# EAGLE board sbus-ppm_pad (EAGLE 5.11)
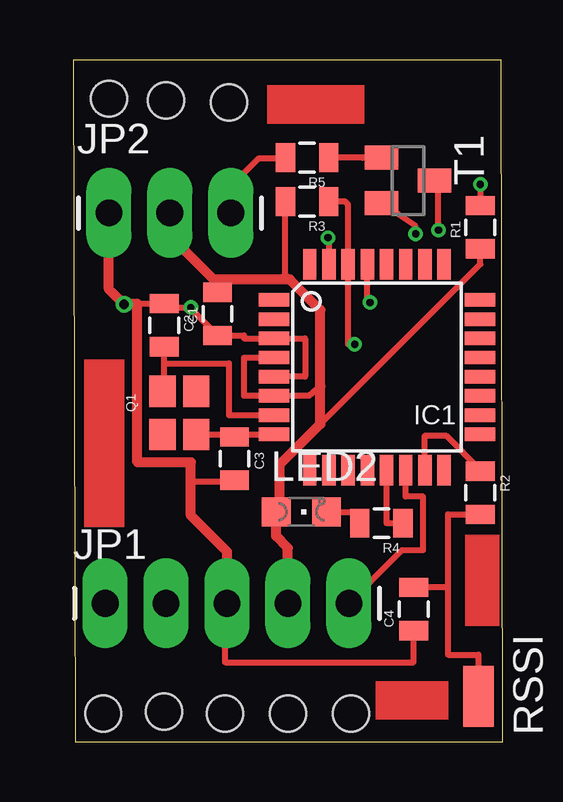
[diagram p0: board, top side]
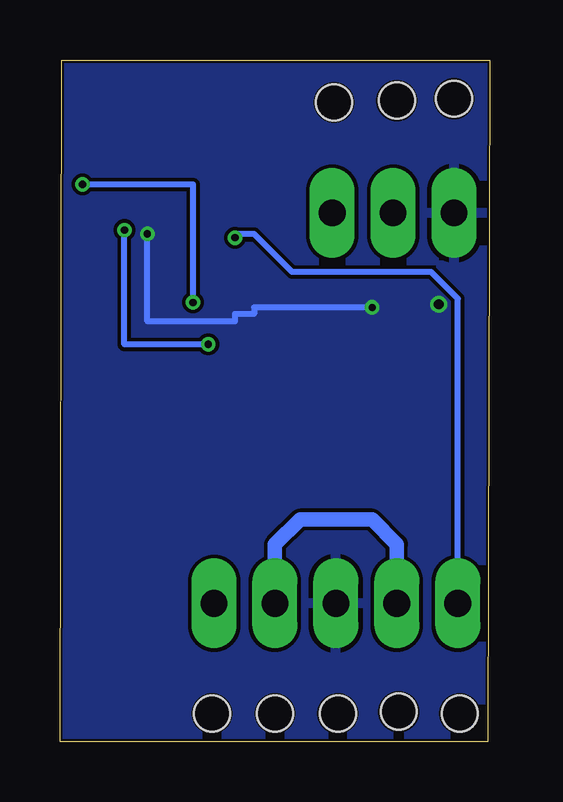
[diagram p1: board, bottom side, seen from below]

Size 17.9 x 28.42 mm. Coordinates in mm from the lower left corner, seen from the top.
Outline: 0.08,0 17.9,0 17.83,28.42 0,28.42 0.08,0
Copper layers (1*16): Top 0.035mm / dielectric 1.5mm / Bottom 0.035mm
Design rules "PCB-POOL Standard *": minimum track width 0.15mm, minimum drill 0.3mm, track to track 0.15mm, track to pad 0.15mm, pad to pad 0.15mm, via to via 0.15mm, smd to smd 0.15mm, copper to edge 0.1mm, drill to drill 0.2mm, minimum pad ring 0.2mm, minimum via ring 0.15mm, stop-mask expansion 0.075mm, vias tented up to drill 30mil, thermal gap 0.2mm
Holes 1.5 mm at 1.25,1.17 3.79,1.25 6.33,1.17 8.95,1.17 11.57,1.17 1.49,26.81 3.87,26.73 6.49,26.65

## Footprints (pad centres in the part's own frame; a part is rotated, then mirrored left to right if it is on the bottom)
0805 = smd 0.8 x 1.2: 1 -0.9,0; 2 0.9,0
TQFP32-08 = smd 1.27 x 0.559: 1 -4.293,2.8; 2 -4.293,2; 3 -4.293,1.2; 4 -4.293,0.4; 5 -4.293,-0.4; 6 -4.293,-1.2; 7 -4.293,-2; 8 -4.293,-2.8; 17 4.293,-2.8; 18 4.293,-2; 19 4.293,-1.2; 20 4.293,-0.4; 21 4.293,0.4; 22 4.293,1.2; 23 4.293,2; 24 4.293,2.8 | smd 0.559 x 1.27: 9 -2.8,-4.293; 10 -2,-4.293; 11 -1.2,-4.293; 12 -0.4,-4.293; 13 0.4,-4.293; 14 1.2,-4.293; 15 2,-4.293; 16 2.8,-4.293; 25 2.8,4.293; 26 2,4.293; 27 1.2,4.293; 28 0.4,4.293; 29 -0.4,4.293; 30 -1.2,4.293; 31 -2,4.293; 32 -2.8,4.293
1X05_LONGPADS = drill 1.118 pad 1.88 long: 1 0,0; 2 2.54,0; 3 5.08,0; 4 7.62,0; 5 10.16,0
1X03_LONGPADS = drill 1.118 pad 1.88 long: 1 0,0; 2 2.54,0; 3 5.08,0
CHIPLED_0805 = smd 1.2 x 1.2: A 0,-1.05; C 0,1.05
X22 = smd 1.3 x 1.1: 1 0.9,0.7; 2 -0.9,0.7; 3 -0.9,-0.7; 4 0.9,-0.7
SMD1,27-2,54 = smd 1.27 x 2.54: 1 0,0
SOT23 = smd 1 x 1.4: 1 -0.95,-1.1; 2 0.95,-1.1; 3 0,1.1

## Placement (x,y rotation side)
C1  100n  [0805]  6.01,17.84 270 top
C2  22n  [0805]  3.79,17.36 270 top
C3  22n  [0805]  6.72,11.8 90 top
C4  22µF  [0805]  14.19,5.53 90 top
IC1  atmega88  [TQFP32-08]  12.65,15.61 0 top
JP1  [1X05_LONGPADS]  1.33,5.77 0 top
JP2  [1X03_LONGPADS]  1.49,22.04 0 top
LED2  [CHIPLED_0805]  9.5,9.58 270 top
Q1  20 Mhz  [X22]  4.42,13.71 270 top
R1  1k  [0805]  16.96,21.44 90 top
R2  68k  [0805]  16.96,10.38 270 top
R3  1k  [0805]  9.74,22.52 180 top
R4  100R  [0805]  12.84,9.11 180 top
R5  10k  [0805]  9.74,24.35 180 top
RSSI  [SMD1,27-2,54]  16.88,1.88 0 top
T1  BC817  [SOT23]  13.95,23.39 270 top

## Library data of the parts
C1-C4 JP1 JP2 R1-R5 = SparkFun
IC1 = avr-4
LED2 = led
Q1 = seb
RSSI = wirepad
T1 = transistor

## Nets
+5V: C1.1 IC1.4 IC1.6 JP1.2 JP1.4 JP2.2 LED2.A R1.1 R3.2
AGND: IC1.21
GND: C1.2 C2.1 C3.1 C4.1 IC1.3 IC1.5 JP1.3 JP2.1 T1.2
N$3: IC1.15 R2.1
N$4: IC1.14 JP1.5
N$5: JP2.3 R5.2
N$7: C4.2 R2.2 RSSI.1
N$8: IC1.29 R1.2
N$9: C3.2 IC1.8 Q1.1
N$10: C2.2 IC1.7 Q1.3
N$11: R5.1 T1.1
N$12: IC1.31 JP1.1
N$14: LED2.C R4.2
N$15: IC1.13 R4.1
N$16: IC1.30 R3.1 T1.3

## Tracks (layer width: path | path; a pad name or v marks a point on that pad's centre or on a via)
+5V
  Top 0.254: 10.29,13.24 16.96,19.91 R1.1 | 10.29,14.82 9.82,14.41 IC1.6 7.12,14.41 7.12,16.02 IC1.4 | LED2.A 8.93,9.58 8.61,9.58 | C1.1 6.54,19.27 5.85,19.27 | R3.2 8.84,19.48 8.63,19.27
  Top 0.406: 8.61,9.58 8.61,11.01 8.61,11.56 10.29,13.24 10.29,14.82 10.29,18 9.03,19.27 8.63,19.27 5.85,19.27 4.03,21.09 JP2.2 | JP1.4 8.95,8.07 8.45,8.57 LED2.A
  Bottom 0.61: JP1.2 3.87,8.23 4.9,9.27 7.9,9.27 8.95,8.21 JP1.4
GND  (via drill 0.3, 0.4)
  Top 0.254: 2.68,18.26 C2.1 3.47,18.1 v4.9,18.1 5.06,17.89 C1.2 7.12,16.94 7.12,16.81 IC1.3 9.66,16.81 9.66,15.21 IC1.5 | 4.9,9.42 4.9,9.74 | T1.2 14.27,21.49 v14.27,21.17 | C3.1 6.62,10.85 4.9,10.85 | C4.1 14.19,3.31 6.33,3.31 6.33,5.77 JP1.3
  Top 0.406: JP1.3 6.41,7.91 4.9,9.42 4.9,10.85 4.9,11.65 2.68,11.65 2.68,18.26 v2.12,18.23 1.49,18.87 JP2.1
  Bottom 0.254: v14.27,21.17 14.27,17.52 10.61,17.52 10.61,17.84 9.82,17.84 9.82,18.1 v4.9,18.1
  pour Bottom: 0.14,28.47 17.92,28.47 17.92,-0.26 0.14,-0.26
N$3
  Top 0.254: R2.1 16.96,11.33 15.54,12.76 14.65,12.76 IC1.15
N$4
  Top 0.254: IC1.14 13.85,10.22 14.58,10.22 14.58,7.99 13.71,7.99 JP1.5
N$5
  Top 0.254: R5.2 8.84,24.32 7.73,24.32 6.57,23.15 JP2.3
N$7
  Top 0.254: R2.2 15.62,9.48 15.62,6.43 | 15.62,6.43 15.62,3.63 16.89,3.63 RSSI.1 | 15.62,6.43 C4.2
N$8  (via drill 0.3)
  Top 0.254: v16.96,23.23 R1.2 | v12.36,18.31 12.25,18.31 IC1.29
  Bottom 0.254: v12.36,18.31 12.36,23.23 v16.96,23.23
N$9
  Top 0.254: 6.72,12.81 C3.2 | 6.72,12.81 IC1.8 | Q1.1 5.28,12.81 6.72,12.81
N$10
  Top 0.254: Q1.3 3.79,14.13 3.79,15.77 | IC1.7 6.49,13.61 6.49,15.77 3.79,15.77 | 3.79,15.77 C2.2
N$11
  Top 0.254: R5.1 12.05,24.35 T1.1
N$12  (via drill 0.3)
  Top 0.254: IC1.31 10.65,21.01 v10.61,21.01
  Bottom 0.254: v10.61,21.01 10.61,21.17 9.82,21.17 8.23,19.58 2.44,19.58 1.33,18.47 JP1.1 1.41,5.85
N$14
  Top 0.254: LED2.C 11.94,9.58 R4.2
N$15
  Top 0.254: R4.1 13.05,9.11 IC1.13
N$16  (via drill 0.3)
  Top 0.254: T1.3 15.22,23.31 v15.22,21.33 | v11.73,16.57 11.45,16.57 IC1.30 11.45,22.4 11.33,22.52 R3.1 | R3.1
  Bottom 0.254: v15.22,21.33 15.22,16.57 v11.73,16.57
(copper drawn outside any net)
  shapes: Top area x4

## Text on the board
tStop: SBUS | Spektrum | RSSI | PPM
bStop: + | s | - | SBUS TO PPM | seb@exse.net | s | + | - | + | s